# EAGLE board font (EAGLE 5.06)
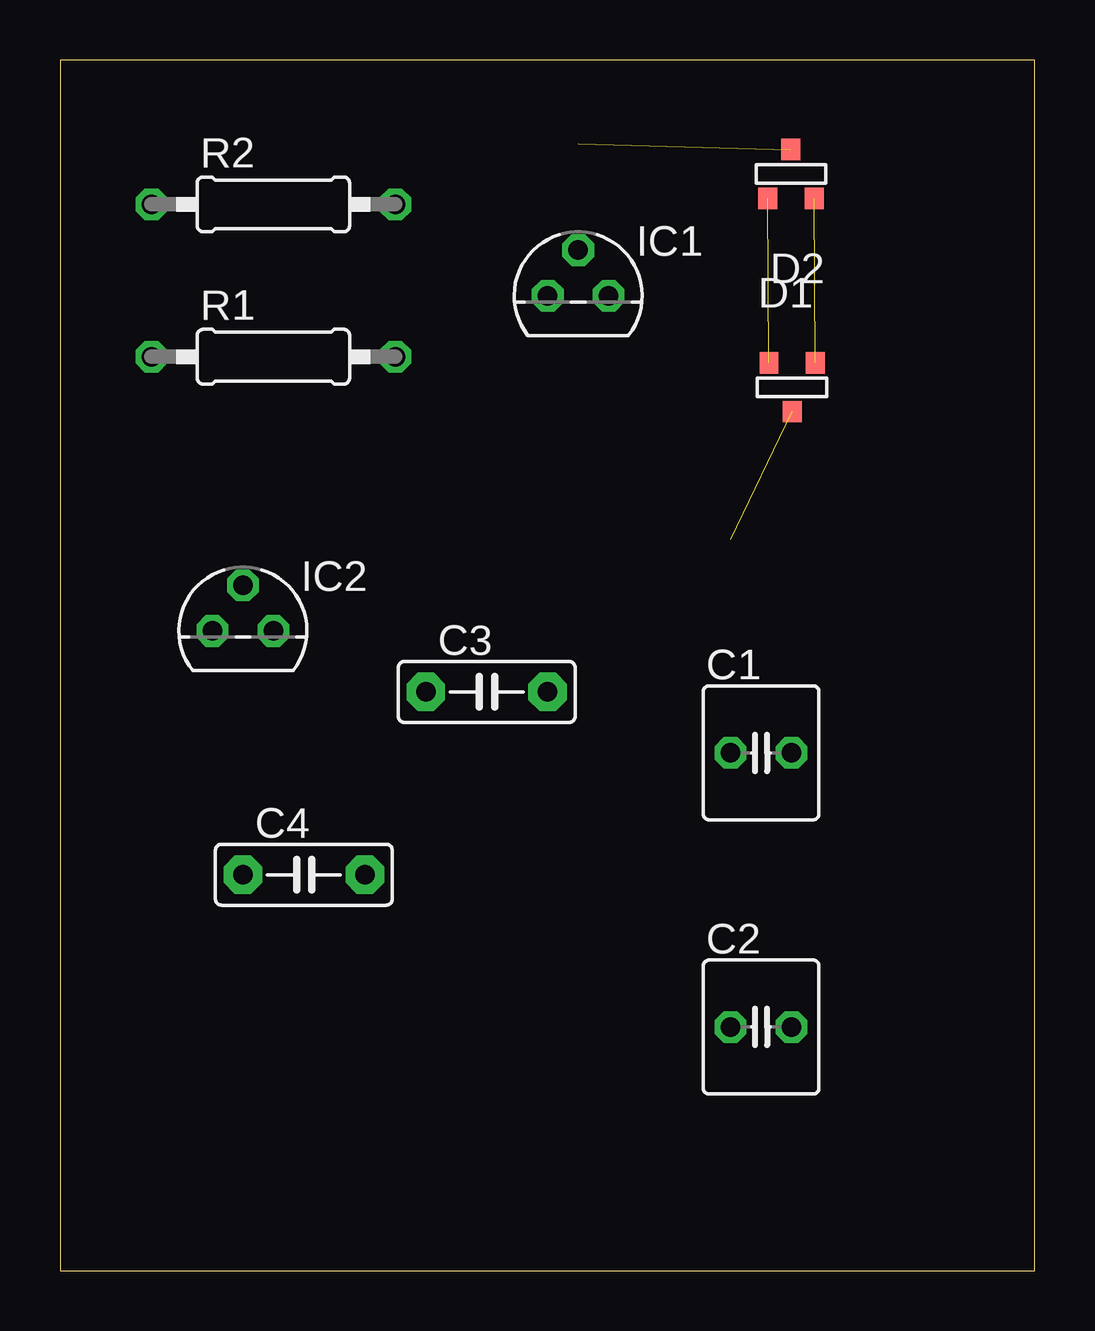
[diagram p0: board, top side]
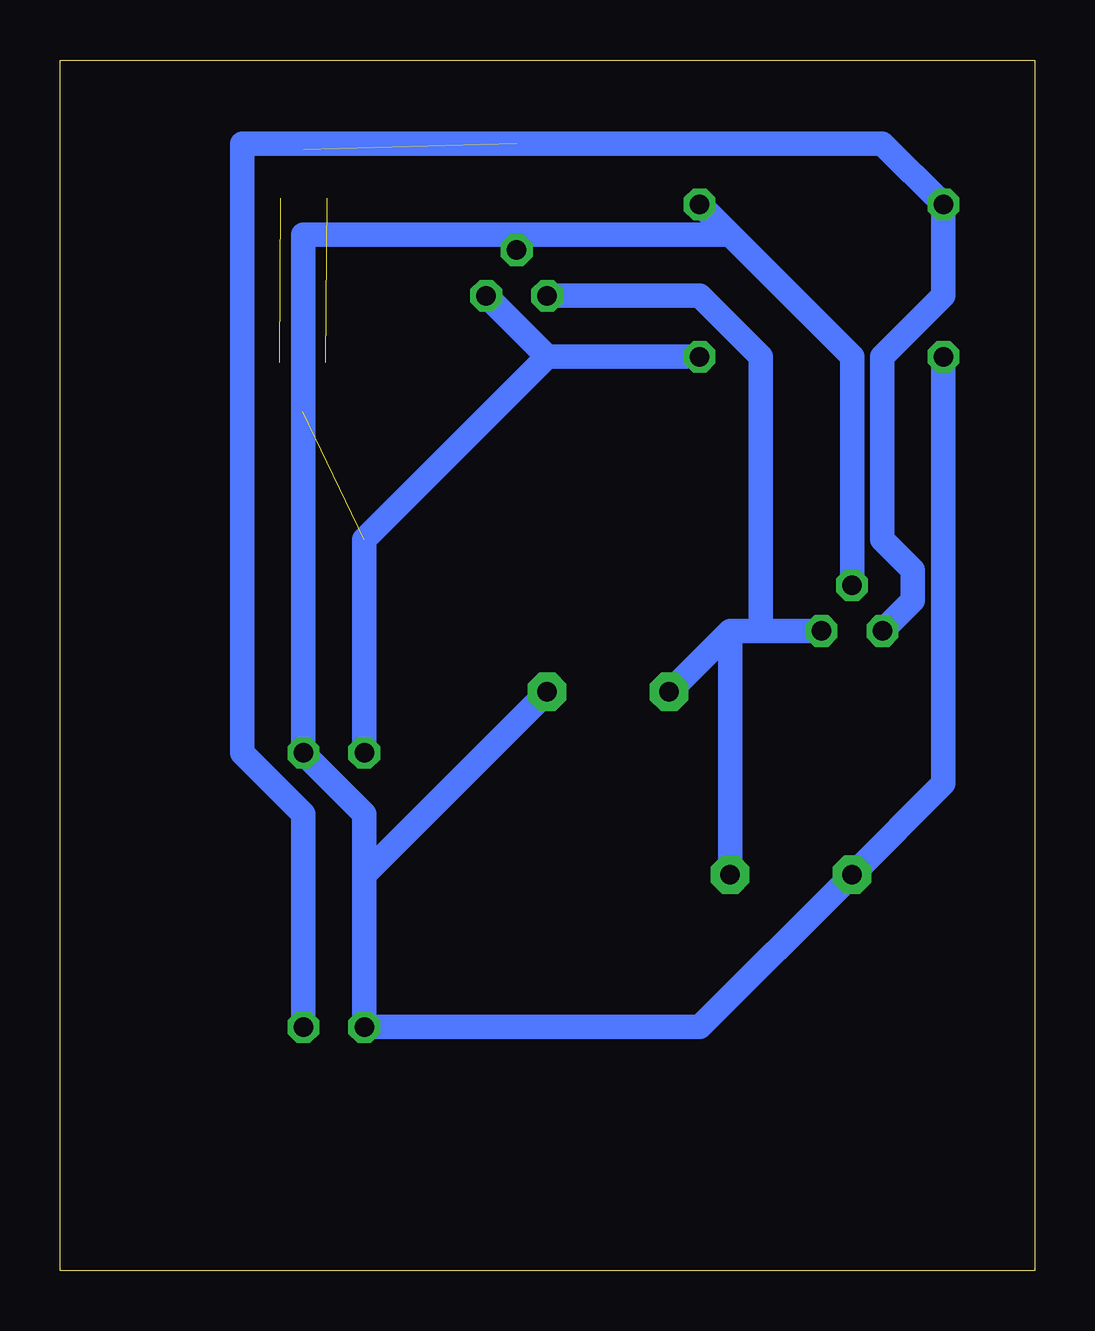
[diagram p1: board, bottom side, seen from below]

Size 40.62 x 50.47 mm. Coordinates in mm from the lower left corner, seen from the top.
Outline: 0,0 40.62,0 40.62,50.47 0,50.47 0,0
Copper layers (1*16): Top 0.035mm / dielectric 1.5mm / Bottom 0.035mm
Design rules "default *": minimum track width 40mil, minimum drill 24mil, track to track 8mil, track to pad 8mil, pad to pad 8mil, via to via 8mil, smd to smd 8mil, copper to edge 40mil, drill to drill 8mil, minimum pad ring 10mil, minimum via ring 8mil, stop-mask expansion 4mil, vias tented up to drill 0mil, thermal gap 10mil

## Footprints (pad centres in the part's own frame; a part is rotated, then mirrored left to right if it is on the bottom)
C025-060X050 = drill 0.813 octagon: 1 -1.27,0; 2 1.27,0
C5B2.5 = drill 0.813 pad 1.6 octagon: 1 -2.54,0; 2 2.54,0
SOT-23 = smd 0.787 x 0.889: 1 0.025,-1.016; 2 -0.94,1.016; 3 0.991,1.016
TO92 = drill 0.813 octagon: 1 -1.27,0; 2 0,1.905; 3 1.27,0
0207/10 = drill 0.813 octagon: 1 -5.08,0; 2 5.08,0

## Placement (x,y rotation side)
C1  1000uF  [C025-060X050]  29.21,21.59 0 top
C2  1000uF  [C025-060X050]  29.21,10.16 0 top
C3  100nF  [C5B2.5]  17.78,24.13 0 top
C4  100nF  [C5B2.5]  10.16,16.51 0 top
D1  [SOT-23]  30.48,36.83 0 top
D2  [SOT-23]  30.48,45.72 180 top
IC1  7812L  [TO92]  21.59,40.64 0 top
IC2  7812L  [TO92]  7.62,26.67 0 top
R1  10k  [0207/10]  8.89,38.1 0 top
R2  10k  [0207/10]  8.89,44.45 0 top

## Library data of the parts
C1 C2 = rcl
C3 C4 = capacitor-wima
D1 D2 = zetex
IC1 IC2 = linear
R1 R2 = resistor

## Nets
GND: C1.2 C2.1 C3.2 C4.1 IC1.2 IC2.2 R1.1 R2.2
N$1: C1.1 D1.1 IC1.3 R1.2
N$2: C2.2 D2.1 IC2.1 R2.1
N$5: D1.2 D2.3
N$6: D1.3 D2.2
VCC: C3.1 C4.2 IC1.1 IC2.3

## Tracks (layer width: path | path; a pad name or v marks a point on that pad's centre or on a via)
GND
  Bottom 1.016: 12.7,43.18 R2.2 | 12.7,43.18 7.62,38.1 IC2.2 | 21.59,43.18 12.7,43.18 | 27.94,16.51 27.94,19.05 C1.2 30.48,43.18 21.59,43.18 | 27.94,16.51 C2.1 13.97,10.16 C4.1 3.81,20.32 R1.1 | 27.94,16.51 C3.2 | 21.59,43.18 IC1.2
N$1  (1 unrouted)
  Bottom 1.016: 20.32,38.1 R1.2 | 20.32,38.1 IC1.3 | C1.1 27.94,30.48 20.32,38.1
N$2  (1 unrouted)
  Bottom 1.016: IC2.1 5.08,27.94 5.08,29.21 6.35,30.48 6.35,38.1 3.81,40.64 R2.1 6.35,46.99 21.59,46.99 33.02,46.99 33.02,21.59 30.48,19.05 C2.2
N$5  (1 unrouted)
N$6  (1 unrouted)
VCC
  Bottom 1.016: 12.7,26.67 11.43,26.67 | 11.43,26.67 IC2.3 | 12.7,26.67 C3.1 | IC1.1 13.97,40.64 11.43,38.1 11.43,26.67 | C4.2 12.7,26.67